# Altium PCB eth_bridge_v2_pcb.PcbDoc
Units mil, origin at the board's own origin, x right, y up, seen from the top; angles counter-clockwise.
Board outline 2370 x 1045 mil, 2 copper layers (Top Layer, Bottom Layer(GND)), stack 27.559 mil thick; 28 components, 24 nets, 114 pads, 164 vias.
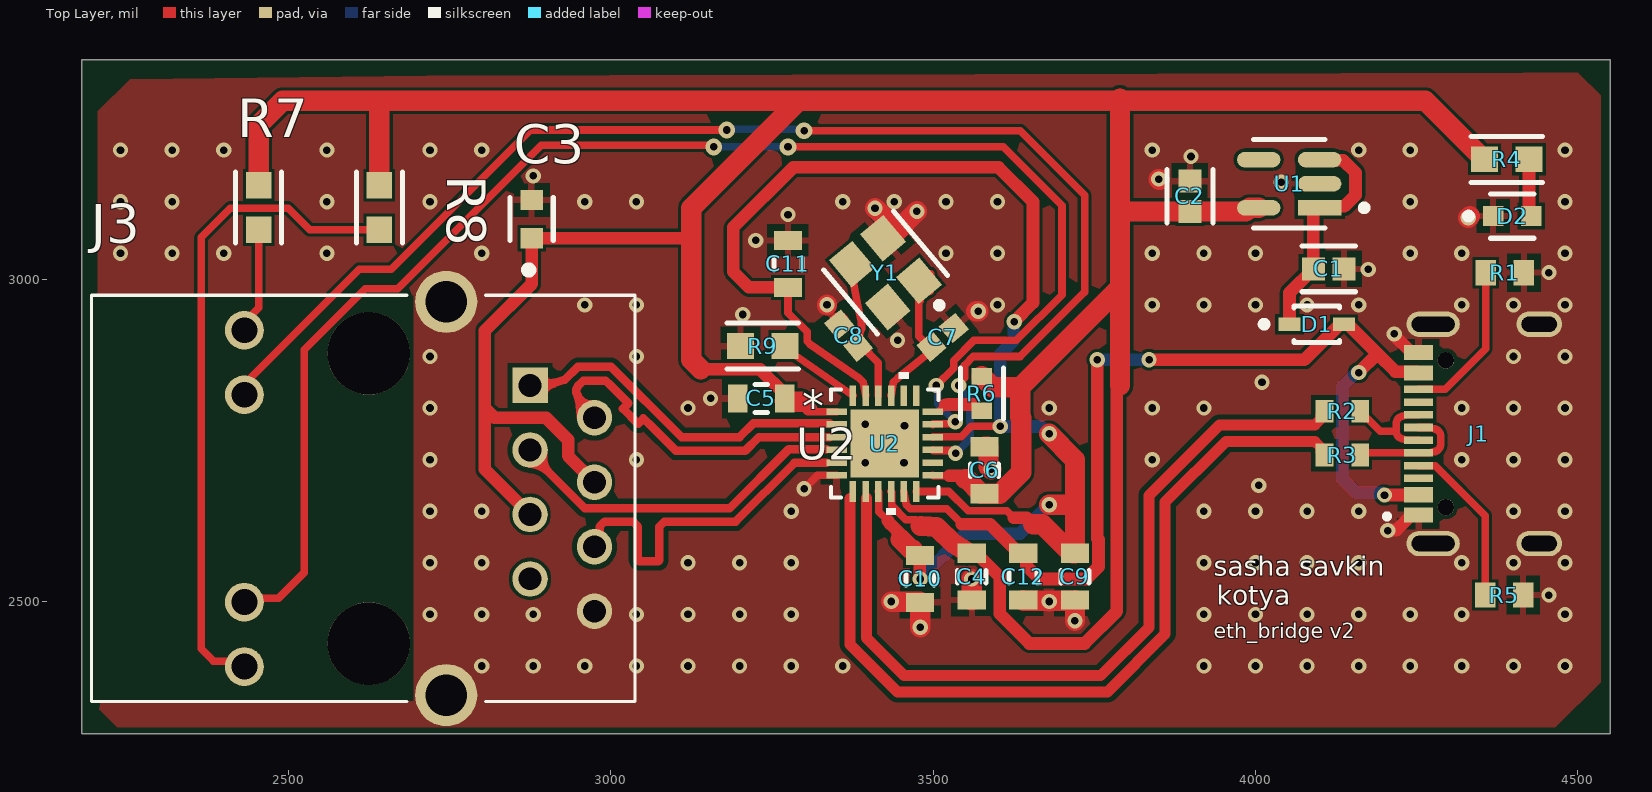
[diagram p0: Top Layer view]
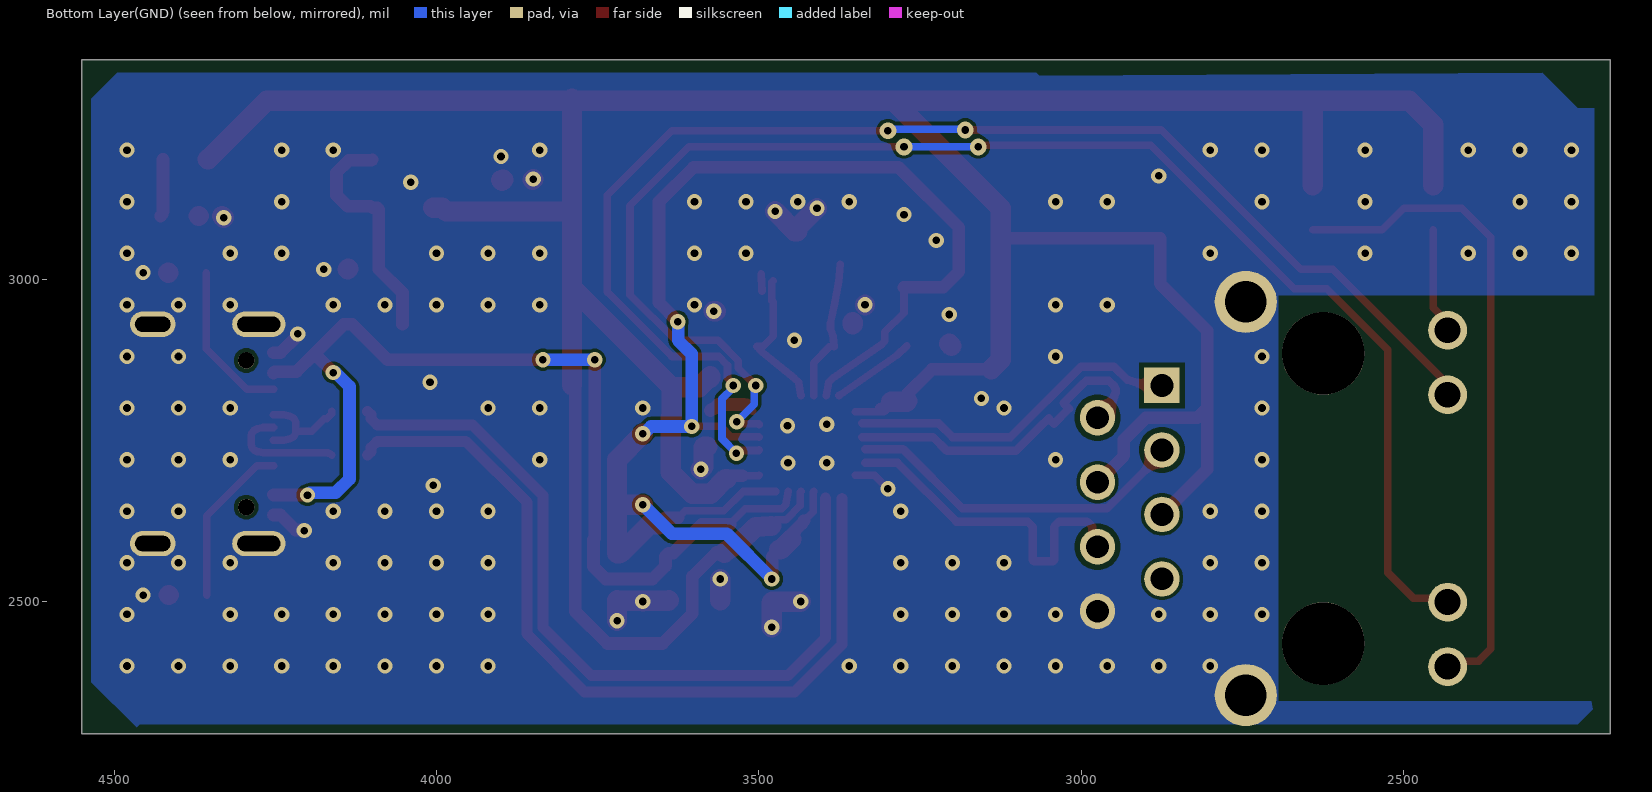
[diagram p1: Bottom Layer(GND) view, seen from below]
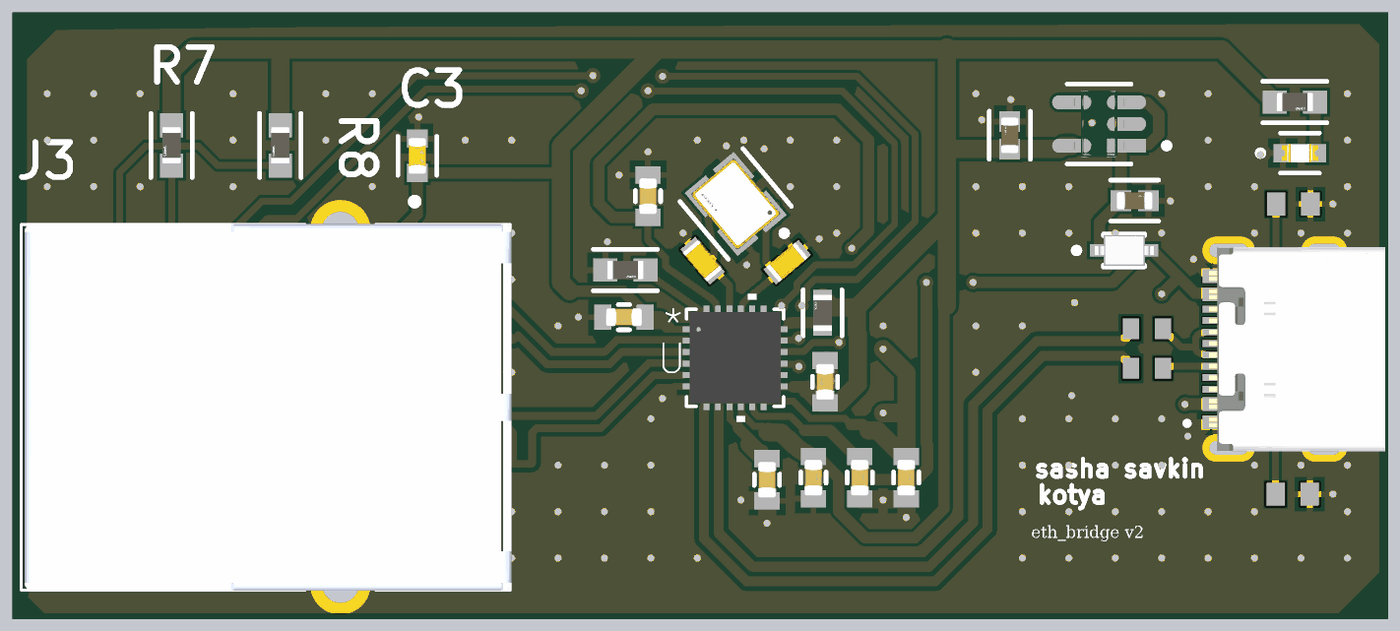
[diagram p2: 3D render of the assembled board from above, using the file's embedded part models]

## Layer stack, top to bottom
Top Solder: solder mask 0.7874, Solder Resist, Dk 3.5
Top Layer: signal copper 0.689
Dielectric 1: dielectric 26.1811, FR-4, Dk 4.3
Bottom Layer(GND): signal copper 0.689
Bottom Solder: solder mask 0.7874, Solder Resist, Dk 3.5

## Board outline
2180,2295 4550,2295 4550,3340 2180,3340

## Design rules (kind name [scope] priority, off if disabled: settings)
BoardOutlineClearance [All] p1: gap=10 ignorepadtopadclearanceinfootprint=FALSE except(0: Arc-SplitContinuation Track-SplitContinuation SMDPad-SplitContinuation THPad-SplitContinuation Via-SplitContinuation Fill-SplitContinuation Poly-SplitContinuation Region-SplitContinuation Text-SplitContinuation)
Clearance Clearance_Z100_Z90 [InDifferentialPair('D_USB') Or InDifferentialPair('D_TX') Or InDifferentialPair('D_RX') Or InDifferentialPair('ETH_RX') Or InDifferentialPair('ETH_TX') Or InDifferentialPair('USB') vs InPolygon] p1: gap=7.99 ignorepadtopadclearanceinfootprint=FALSE
Clearance Clearance_USB [InComponent('J1') OR (HasFootprint('0402') OR HasFootprint('RMCF0402*'))] p2: gap=6 ignorepadtopadclearanceinfootprint=FALSE except(5: THPad-THPad)
Clearance [All] p3: gap=5 ignorepadtopadclearanceinfootprint=FALSE
DiffPairsRouting rx [InDifferentialPair('ETH_RX')] p1: maxlimit=7.99 minlimit=7.99 mostfreqgap=7.99 toplayer_minwidth=13.15 toplayer_maxwidth=13.15 toplayer_prefwidth=13.15 bottomlayer_minwidth=13.15 bottomlayer_maxwidth=13.15 bottomlayer_prefwidth=13.15 impedanceprofiledriven=TRUE impedanceprofileid={D73B9253-5F31-4390-8922-EA40AF682137} impedanceprofilevalue=100.000000 maxuncoupledlength=500
DiffPairsRouting tx [InDifferentialPair('ETH_TX')] p2: maxlimit=7.99 minlimit=7.99 mostfreqgap=7.99 toplayer_minwidth=13.15 toplayer_maxwidth=13.15 toplayer_prefwidth=13.15 bottomlayer_minwidth=13.15 bottomlayer_maxwidth=13.15 bottomlayer_prefwidth=13.15 impedanceprofiledriven=TRUE impedanceprofileid={D73B9253-5F31-4390-8922-EA40AF682137} impedanceprofilevalue=100.000000 maxuncoupledlength=500
DiffPairsRouting usb [InDifferentialPair('USB')] p3: maxlimit=7.99 minlimit=7.99 mostfreqgap=7.99 toplayer_minwidth=17.09 toplayer_maxwidth=17.09 toplayer_prefwidth=17.09 bottomlayer_minwidth=17.09 bottomlayer_maxwidth=17.09 bottomlayer_prefwidth=17.09 impedanceprofiledriven=TRUE impedanceprofileid={98D29A7B-6AB0-4A7E-9638-67E44013104D} impedanceprofilevalue=90.000000 maxuncoupledlength=500
HoleToHoleClearance [All] p1: gap=7.87 allowstackedmicrovias=FALSE
PlaneConnect PlaneConnect_1 [All] p1: planeconnectstyle=Relief reliefexpansion=20 reliefentries=4 reliefconductorwidth=10 reliefairgap=10
PolygonConnect PolygonConnect_3 [InNet('VSUS') AND IsPolygon] p1: connectstyle=Direct reliefconductorwidth=10 reliefentries=4 polygonreliefangle="90 Angle" airgapwidth=10
PolygonConnect PolygonConnect_2 [InNet('GND') AND IsPolygon] p2: thpad.connectstyle=Direct thpad.reliefconductorwidth=10 thpad.reliefentries=4 thpad.polygonreliefangle="90 Angle" thpad.airgapwidth=10 smdpad.connectstyle=Relief smdpad.reliefconductorwidth=10 smdpad.reliefentries=4 smdpad.polygonreliefangle="90 Angle" smdpad.airgapwidth=10 via.connectstyle=Direct via.reliefconductorwidth=10 via.reliefentries=4 via.polygonreliefangle="90 Angle" via.airgapwidth=10
PolygonConnect PolygonConnect_1 [InNet('+3V3') AND IsPolygon] p3: connectstyle=Direct reliefconductorwidth=10 reliefentries=4 polygonreliefangle="90 Angle" airgapwidth=10
PolygonConnect [All] p4: connectstyle=Relief reliefconductorwidth=10 reliefentries=4 polygonreliefangle="90 Angle" airgapwidth=10
RoutingVias [All] p1: holewidth=11.81 width=27.56 viastyle="Through Hole" minholewidth=11.81 minwidth=25.98 maxholewidth=11.81 maxwidth=39.37
SolderMaskExpansion SolderMaskExpansion_2 [IsVia] p1: expansion=4 istentingtop=TRUE
SolderMaskExpansion [All] p2: expansion=4 istentingtop=FALSE
SupplyNets "Schematic Supply Nets_3" [InNet('VBUS')] p1: voltage=0.000
SupplyNets "Schematic Supply Nets_2" [InNet('+3V3')] p2: voltage=0.000
SupplyNets "Schematic Supply Nets_1" [InNet('GND')] p3: voltage=0.000
SupplyNets "Schematic Supply Nets" [InNet('VSUS')] p4: voltage=0.000
UnRoutedNet [All] p1: checkbadconnections=TRUE
Width [All] p1: maxlimit=31.5 minlimit=11.81 preferedwidth=23.62 toplayer_prefwidth=19.68 minimp=50.000000 maximp=50.000000 favimp=50.000000
26 further rules are at their usual default settings.

## Classes and differential pairs
component class eth_bridge_v2: C1 C2 C3 C4 C5 C6 C7 C8 C9 C10 C11 C12 D1 D2 J1 R1 R2 R3 R4 R5 R6 R8 R9 U1 U2 Y1
differential pair ETH_TX: +ETH_TX_P -ETH_TX_N
differential pair USB: +USB_P -USB_N
differential pair ETH_RX: +ETH_RX_P -ETH_RX_N

## Components (designator, comment, footprint, x,y, rotation, side; value= is the part's Value field where it differs from the comment)
C1 "10u 0603 X7T" FP-GRM188-0_2-IPC_C 4113.43,3015.79 r0 top
C2 "10u 0603 X7T" FP-GRM188-0_2-IPC_C 3898.35,3128.44 r90 top
C3 "CC0603KRX7R9BB104" FP-CC0603-DA-MFG 2877.61,3093.03 r90 top value="100 nF"
C4 "CGA3E1X7R1C105M080AC" FP-CGA3E-0_3-0_1-IPC_B 3560,2538.58 r270 top
C5 "CGA3E1X7R1C105M080AC" FP-CGA3E-0_3-0_1-IPC_B 3233.58,2815 r180 top
C6 "CGA3E1X7R1C105M080AC" FP-CGA3E-0_3-0_1-IPC_B 3580,2703.58 r90 top
C7 "CC0603JRNPO9BN180" CAPC1608X90X40LL10T20 3514.85,2909.75 r220 top
C8 "CC0603JRNPO9BN180" CAPC1608X90X40LL10T20 3369.1,2912.4 r310 top
C9 "CGA3E1X7R1C105M080AC" FP-CGA3E-0_3-0_1-IPC_B 3719.85,2538.58 r270 top
C10 "CGA3E1X7R1C105M080AC" FP-CGA3E-0_3-0_1-IPC_B 3480,2535 r270 top
C11 "CGA3E1X7R1C105M080AC" FP-CGA3E-0_3-0_1-IPC_B 3275,3023.58 r90 top
C12 "CGA3E1X7R1C105M080AC" FP-CGA3E-0_3-0_1-IPC_B 3639.85,2538.58 r270 top
D1 "BAT60JFILM" FP-BAT60JFILM-MFG 4095,2930 r0 top
D2 "LTST-C190KGKT" FP-LTST-C190KGKT-MFG 4398.16,3097.72 r0 top
J1 "USB4105-GF-A" GCT_USB4105-GF-A 4440,2760 r90 top
J3 "HR911105A" HANRUN_HR911105A 2625,2659.8 r90 top
R1 "RC0603FR-075K1L" RESC1608X55X25ML10T15 4386.68,3009.96 r0 top
R2 "RC0603FR-0722RL" RESC1608X55X25NL10T15 4134.72,2794.98 r180 top
R3 "RC0603FR-0722RL" RESC1608X55X25NL10T15 4134.72,2726.98 r180 top
R4 "AF0603FR-072K49L" FP-AF0603-IPC_A 4389.47,3185.71 r0 top
R5 "RC0603FR-075K1L" RESC1608X55X25ML10T15 4385.63,2510.04 r180 top
R6 "RC0603FR-0710KL" FP-RC0603-0_55-IPC_C 3575.71,2822.44 r90 top
R7 "AF0603FR-072K49L" FP-AF0603-IPC_A 2454.23,3110.99 r270 top
R8 "AF0603FR-072K49L" FP-AF0603-IPC_A 2641.42,3110.99 r270 top
R9 "AF0603FR-072K49L" FP-AF0603-IPC_A 3236.06,2896.23 r0 top
U1 "AP2112K-3.3TRG1" FP-SOT25-IPC_A 4052.22,3147.83 r180 top
U2 "RTL8152B-VB-CG" RTL8152B-VB-CG_RTK 3425,2745 r0 top
Y1 "ABM8AIG-25.000MHZ-12-2-T3" FP-ABM8AIG-MFG 3426.03,3010.17 r130 top

## Footprints (in the part's own frame and the unit in brackets; to place one, negate y for a bottom-side part, rotate by r counter-clockwise, add the part's x,y. Pads: shape width x height; smd on the part's side, far side on the other; paste and mask are expansions set on the pad)
CAPC1608X90X40LL10T20 [mm] "Chip Capacitor, 2-Leads, Body 1.7x0.9mm, IPC High Density"
  rect 0.85x0.85 smd: 1(-0.575,0) 2(0.575,0)
  body extent -0.85,-0.45 0.85,0.45, height 0.9
FP-ABM8AIG-MFG [mm]
  rect 1.4x1.2 smd paste+0 mask+0: 1(-1.1,-0.8) 2(1.1,-0.8) 3(1.1,0.8) 4(-1.1,0.8)
  silkscreen extent -2.47,-1.8 1.65,1.8, body extent -1.9,-1.5 1.9,1.5, height 0.25
FP-AF0603-IPC_A [mil]
  rect 41.68x39.85 smd paste+0 mask+0: 1(-34.52,0) 2(34.52,0)
  silkscreen extent -55,-36 55,36, body extent -75,-40 75,40, height 10
FP-BAT60JFILM-MFG [mm]
  rect 0.86x0.54 smd paste+0 mask+0: 1(-1.07,0) 2(1.07,0)
  silkscreen extent -2.2,-0.72 0.9,0.72, body extent -1.6,-0.82 1.6,0.82, height 0.25
FP-CC0603-DA-MFG [mm]
  rect 0.8x0.9 smd paste+0 mask+0: 1(-0.75,0) 2(0.75,0)
  silkscreen extent -0.85,-0.85 0.85,0.85, body extent -1.35,-0.75 1.35,0.75, height 0.25
FP-CGA3E-0_3-0_1-IPC_B [mm]
  rect 0.756x1.106 smd paste+0 mask+0: 1(-0.925,0) 2(0.925,0)
  silkscreen extent -0.25,-0.55 0.25,0.55, body extent -1.55,-0.8 1.55,0.8, height 0.25
FP-GRM188-0_2-IPC_C [mil]
  rect 35.63x35.68 smd paste+0 mask+0: 1(-23.64,0) 2(23.64,0)
  silkscreen extent -41,-35 41,35, body extent -45,-24 45,24, height 10
FP-LTST-C190KGKT-MFG [mm]
  rect 0.8x0.8 smd paste+0 mask+0: 1(-0.75,0) 2(0.75,0)
  silkscreen extent -1.85,-0.87 0.85,0.87, body extent -1.25,-0.55 1.25,0.55, height 0.25
FP-RC0603-0_55-IPC_C [mil]
  rect 25.93x31.97 smd paste+0 mask+0: 1(-26.64,0) 2(26.64,0)
  silkscreen extent -40,-33 40,33, body extent -44,-22 44,22, height 10
FP-SOT25-IPC_A [mm]
  rect 1.707x0.616 smd paste+0 mask+0: 1(-1.201,0.95)
  rrect100% 1.707x0.616 smd paste+0 mask+0: 2(-1.201,0) 3(-1.201,-0.95) 4(1.201,-0.95) 5(1.201,0.95)
  silkscreen extent -3.08,-1.75 1.4,1.75, body extent -2.55,-2 2.55,2, height 0.25
GCT_USB4105-GF-A [mm]
  rect 0.6x1.15 smd mask+0.05: A1_B12(-3.2,4.755) A4_B9(-2.4,4.755) B1_A12(3.2,4.755) B4_A9(2.4,4.755)
  rect 0.3x1.15 smd mask+0.05: A5(-1.25,4.755) A6(-0.25,4.755) A7(0.25,4.755) A8(1.25,4.755) B5(1.75,4.755) B6(0.75,4.755) B7(-0.75,4.755) B8(-1.75,4.755)
  oval 1x2.1 hole 0.6 slot 1.7 at 90 deg: SH1(-4.32,4.18) SH2(4.32,4.18)
  oval 1x1.8 hole 0.6 slot 1.4 at 90 deg: SH3(-4.32,0) SH4(4.32,0)
  round 0.65 hole 0.65 unplated: ""(-2.89,3.68) ""(2.89,3.68)
  silkscreen extent -3.35,5.9 -3.15,6.1, body extent -4.47,-2.67 4.47,5.03, height 3.26
HANRUN_HR911105A [mm]
  rect 1.398x1.398 / inner round 1.398 / far side rect 1.398x1.398 hole 0.89: 1(4.45,-6.35)
  round 1.398 hole 0.89: 2(3.18,-8.89) 3(1.91,-6.35) 4(0.64,-8.89) 5(-0.63,-6.35) 6(-1.9,-8.89) 7(-3.17,-6.35) 8(-4.44,-8.89)
  round 1.53 hole 1.02: 9(6.625,4.9) 10(4.085,4.9) 11(-4.085,4.9) 12(-6.625,4.9)
  round 2.445 hole 1.63: 15(7.745,-3.05) 16(-7.745,-3.05)
  round 3.25 hole 3.25 unplated: ""(-5.715,0) ""(5.715,0)
  silkscreen extent -8,-10.48 9.15,10.92, body extent -8.02,-10.53 8.02,10.78, height 13.5
RESC1608X55X25ML10T15 [mm] "Chip Resistor, 2-Leads, Body 1.60x0.80mm, IPC Low Density"
  rect 0.8x1 smd: 1(-0.75,0) 2(0.75,0)
  body extent -0.85,-0.45 0.85,0.45, height 0.55
RESC1608X55X25NL10T15 [mm] "Chip Resistor, 2-Leads, Body 1.70x0.90mm, IPC Medium Density"
  rect 0.7x0.9 smd: 1(-0.7,0) 2(0.7,0)
  body extent -0.85,-0.45 0.85,0.45, height 0.55
RTL8152B-VB-CG_RTK [mm]
  rect 0.808x0.255 smd paste+0 mask+0: 1(-1.89,1.25) 2(-1.89,0.75) 3(-1.89,0.25) 4(-1.89,-0.25) 5(-1.89,-0.75) 6(-1.89,-1.25) 13(1.89,-1.25) 14(1.89,-0.75) 15(1.89,-0.25) 16(1.89,0.25) 17(1.89,0.75) 18(1.89,1.25)
  rect 0.255x0.808 smd paste+0 mask+0: 7(-1.25,-1.89) 8(-0.75,-1.89) 9(-0.25,-1.89) 10(0.25,-1.89) 11(0.75,-1.89) 12(1.25,-1.89) 19(1.25,1.89) 20(0.75,1.89) 21(0.25,1.89) 22(-0.25,1.89) 23(-0.75,1.89) 24(-1.25,1.89)
  rect 2.692x2.692 smd paste-1.346 mask+0: 25(0,0)
  silkscreen extent -2.12,-2.8 2.12,2.8, body extent -1.99,-1.99 1.99,1.99, height 0.89

## Part data
C1 C2: library part CMP-06035-057161-1, "10uF 10V X7T 0603 20%", Capacitance=10uF, Case/Package=0603, Dielectric=X7T, Max Operating Temperature=125°C, Min Operating Temperature=-55°C, Package Quantity=10000, Supplier Part Number 1=490-GRM188D71A106KA73JDKR-ND, Tolerance=20%, Voltage Rating=10V, Length=0.063inch, Mount="Surface Mount", Packaging="Tape and Reel", Supplier 1=DigiKey, Thickness=0.039inch, Voltage Rating (DC)=10V, Weight=0.000222oz, Width=0.031inch
C3: library part CMP-2100-03601-2, "CAP CER 0.1UF 50V X7R 0603", Capacitance="100 nF", Manufacturer=YAGEO, Package=CC0603-DA, Temperature="-55°C to +125°C", Temperature Characteristic=X7R, Temperature Coefficient=15%, Temperature Range High=+125°C, Temperature Range Low=-55°C, Tolerance=0.1, Voltage="50 V", Automotive=No, Category=Cap, ComponentLink2Description=Datasheet, ComponentLink2URL=http://www.yageo.com/documents/recent/UPY-GPHC_X7R_6.3V-to-50V_18.pdf, Device Class L1="Passive Components", Device Class L2=Capacitors, Device Class L3="Ceramic Capacitors", Digikey Description="CAP CER 0.1UF 50V X7R 0603", Footprint Url=http://www.yageo.com/exep/pages/download/literatures/UPY-C_GEN_24.pdf, Height=0.9mm, Lead Free=Yes, Manufacturer Part Number=CC0603KRX7R9BB104, Material=Ceramic, Mouser Description="Multilayer Ceramic Capacitor, CC Series, 0.1 - F, - 10%, X7R, 50 V, 0603 [1608 Metric]", Octopart=https://octopart.com/cc0603krx7r9bb104-yageo-42244635, RoHS=TRUE, Voltage Rating="50 V"
C4 C5 C6 C9 C10 C11 C12: library part CMP-08246-001804-1, "Cap Ceramic 1uF 16V X7R 20% Pad SMD 0603 +125°C Automotive T/R", Capacitance=1uF, Case Code (Imperial)=0603, Case Code (Metric)=1608, Dielectric=X7R, Max Operating Temperature=125°C, Min Operating Temperature=-55°C, Package Quantity=4000, Ratings=AEC-Q200, Tolerance=20%, Voltage Rating=16V, Case/Package=0603, Height=0.8mm, Lead Free="Lead Free", Length=0.063inch, Mount="Surface Mount", Packaging="Tape and Reel", Termination=SMD/SMT, Thickness=0.035inch, Voltage Rating (DC)=16V, Weight=7.1E-05oz, Width=0.031inch
C7 C8: library part CMP-1659-00030-1, "Chip Capacitor, 18 pF, +/- 5%, 50 V, -55 to 125 degC, 0603 (1608 Metric), RoHS, Tape and Reel", Case Code (Imperial)=0603, Case Code (Metric)=1608, Max Operating Temperature="155 degC", Min Operating Temperature="-55 degC", Package Quantity=200, Power Rating="100 mW", Resistance="68.1 Ohm", Tolerance=1%, Voltage Rating="50 V", Case\Package=0603, ComponentLink1Description="Manufacturer URL", ComponentLink1URL=http://www.yageo.com/, ComponentLink2Description=Datasheet, ComponentLink2URL=http://www.yageo.com/NewPortal/yageodocoutput?fileName=/pdf/MLCC/UPY-GP_NP0_16V-to-50V_14.pdf, DatasheetVersion="Rev. 14, 07/2016", Height="0.45 mm", Length="1.6 mm", PackageDescription="2-Pin Surface Mount Device, Body 1.6 x 0.8 mm", PackageReference=0603, Packaging="Tape and Reel", Radiation Hardening=No, RoHSCompliant=true, Width="0.8 mm"
D1: library part CMP-12187-000028-1, "SCHOTTKY 10V 3A SOD323", Average Rectified Current=3A, Forward Voltage=580mV, Max Forward Surge Current (Ifsm)=5A, Max Operating Temperature=150°C, Max Repetitive Reverse Voltage (Vrrm)=10V, Max Reverse Leakage Current=7.5uA, Min Operating Temperature=-65°C, Package Quantity=1, Contact Plating=Tin, Current Rating=3A, Element Configuration=Single, Forward Current=3A, Height=1.07mm, Lead Free="Lead Free", Length=1.8mm, Max Reverse Voltage (DC)=10V, Max Surge Current=5A, Mount="Surface Mount", Number of Pins=2, Output Current=3A, Packaging="Tape and Reel", Peak Non-Repetitive Surge Current=5A, Peak Reverse Current=7.5uA, Polarity=Standard, Radiation Hardening=No, REACH SVHC="No SVHC", Supplier 1="Future Electronics", Supplier Part Number 1=BAT60JFILM, Voltage Rating (DC)=10V, Weight=0.01lb, Width=1.45mm
D2: library part CMP-2000-05197-2, "LED GREEN CLEAR CHIP SMD", Case Code (Imperial)=0603, Case Code (Metric)=1608, Color=Green, Forward Current=30mA, Forward Voltage=2V, Lens Color=Colorless, Max Operating Temperature=85°C, Min Operating Temperature=-55°C, Package Quantity=1, Power Dissipation=75mW, Reverse Voltage=5V, Test Current=20mA, Case/Package=0603, Depth=0.8mm, Dominant Wavelength=571nm, Height=0.8mm, Illumination Color=Green, Lead Free="Lead Free", Length=1.6mm, Lens Style=Diffused, Lens Transparency=Clear, Luminous Intensity=35mcd, Mount="Surface Mount", Number of Elements=1, Number of LEDs=1, Number of Pins=2, Packaging="Tape and Reel", Power Rating=75mW, Radiation Hardening=No, Viewing Angle=130°, Wavelength=574nm, Width=0.8mm
J1: library part CMP-007-000001-1, "USB-C", Package=None, Availability=Unavailable, Component Type=Standard, Design Item ID=USB4105-GF-A, MF="{'manufacturer': u'GCT'}", MP=USB4105-GF-A, Pin Count=16, Price=None, Source=USB4105-GF-A.SchLib, Supplier 1="Future Electronics", Supplier Part Number 1=USB4105-GF-A
J3: library part CMP-002-00071-1, "DIP RJ45 Connector;", Case/Package=None, Availability="Not in stock", Check_prices=https://www.snapeda.com/parts/HR911105A/HanRun/view-part/?ref=eda, Component Type=Standard, Design Item ID=HR911105A, MF=hanrun, MP=HR911105A, Pins=13, Price=None, SnapEDA_Link=https://www.snapeda.com/parts/HR911105A/HanRun/view-part/?ref=snap, Source=HR911105A.SchLib
R1 R5: library part CMP-2000-04091-1, Manufacturer=Yageo, Part Number=RC0603FR-075K1L
R2 R3: library part CMP-1659-00033-1, "Chip Resistor, 22 Ohm, +/- 1%, 0.1 W, -55 to 155 degC, 0603 (1608 Metric), RoHS, Tape and Reel", Case\Package=SIP, Max Input Voltage="1.4 V", Max Operating Temperature="100 degC", Max Ouput Current="8 A", Min Operating Temperature="-25 degC", Package Quantity=200, ComponentLink1Description="Manufacturer URL", ComponentLink1URL=http://www.yageo.com/, ComponentLink2Description=Datasheet, ComponentLink2URL=http://www.yageo.com/documents/recent/PYu-RC_Group_51_RoHS_L_04.pdf, DatasheetVersion="Rev. 4, 02/2016", Height="19.6 mm", Length="18.5 mm", Mount="Through Hole", Output Current="8 A", PackageDescription="2-Pin Surface Mount Device, Body 1.6 x 0.8 mm", PackageReference=0603, Packaging=Rail/Tube, Pins=4, Radiation Hardening=No, REACH SVHC=Unknown, RoHSCompliant=true
R4 R7 R8 R9: library part CMP-03412-039857-1, "Anti-Sulfurated Chip Resistors Automotive Grade 2.49kΩ 1% 100ppm/°C 0603", Case/Package=0603, Max Operating Temperature=155°C, Max Power Dissipation=100mW, Min Operating Temperature=-55°C, Resistance=2.49kR, Resistor Type="Thick Film", Temperature Coefficient=100ppm/°C, Tolerance=1%, Features="Moisture Resistant", Height=0.022inch, Length=0.063inch, Number of Terminations=2, Packaging="Tape and Reel", RoHS Compliant=Yes, Series=AF, Width=0.031inch
R6: library part CMP-2100-03664-2, "RES 10K OHM 1% 1/10W 0603", Case Code (Imperial)=0603, Case Code (Metric)=1608, Max Operating Temperature=155°C, Max Power Dissipation=100mW, Min Operating Temperature=-55°C, Resistance=10kR, Resistance Tolerance=1%, Resistor Type="Thick Film", Temperature Coefficient=100ppm/°C, Voltage Rating=75V, Voltage Rating (DC)=50V, Case/Package=0603, Construction=Rectangular, Depth=0.8mm, Features="Moisture Resistant", Height=0.45mm, Lead Free="Lead Free", Lead Pitch=0.3mm, Length=1.6mm, Military Standard=Not, Number of Pins=2, Number of Terminations=2, Packaging="Tape and Reel", Power Rating=100mW, RoHS Compliant=Yes, Series=RC, Size Code=0603, Termination=SMD/SMT, Tolerance=1%, Weight=7.1E-05oz, Width=0.8mm
U1: library part CMP-12756-000035-1, "LDO 3.3V 600MA SOT25", Case/Package=SOT-23-5, Dropout Voltage=250mV, Max Input Voltage=6V, Max Operating Temperature=85°C, Max Output Current=600mA, Min Input Voltage=2.5V, Min Operating Temperature=-40°C, Output Voltage=3.3V, Package Quantity=1, Quiescent Current=55uA, Accuracy=1.5%, Height=1.3mm, Lead Free="Lead Free", Length=3.1mm, Mount="Surface Mount", Number of Outputs=1, Number of Pins=5, Number of Regulators=1, Output Current=600mA, Output Type=Fixed, Packaging="Tape and Reel", Polarity=Positive, Supplier 1=Avnet, Supplier Part Number 1=AP2112K-3.3TRG1, Width=1.7mm
U2: "Description", Manufacturer_Name=Realtek, Copyright="Copyright (C) 2026 Ultra Librarian. All rights reserved.", Manufacturer_Part_Number=RTL8152B-VB-CG, RefDes=RefDes, Type=Type
Y1: library part CMP-27762-015150-1, "Crystal 25MHz ±20ppm (Tol) ±100ppm (Stability) 12pF FUND 50Ω Automotive 4-Pin Ultra Mini-CSMD T/R", Case/Package=SMD/SMT, ESR (Equivalent Series Resistance)=50R, Frequency=25MHz, Frequency Stability=100ppm, Frequency Tolerance=20ppm, Load Capacitance=12pF, Max Operating Temperature=125°C, Min Operating Temperature=-40°C, Ratings=AEC-Q200, Height=0.031inch, Length=0.126inch, Mount="Surface Mount", Packaging="Tape and Reel", RoHS Compliant=Yes, Series=ABM8AIG, Width=0.098inch

## Via types
v1: diameter 23.62, hole 11.81, Top Layer to Bottom Layer(GND), tented both sides, 160 vias
v2: diameter 25.98, hole 11.81, Top Layer to Bottom Layer(GND), tented both sides, 4 vias

## Nets (pads, with @x,y where several pads share a name; then routed paths per layer and width w, separated by ;. In a path a pad name is that pad's centre, name@x,y a point inside that pad or via, vN(x,y) a via of type N, cw(c..) or ccw(c..) an arc to the next point about the centre after c; other vN are vias at no path point)
+3V3: C2.1 C3.1 C4.1 C5.1 C6.1 J3.4 J3.5 R4.1 R6.2 R7.1 R8.1 U1.5 U2.1 U2.10 U2.13 | length 5976.6
  Top Layer w11.81: 3310.79,2798.39 3314.96,2794.21 U2.1 ; U2.10 3435.73,2669.7 3435.73,2648.96 3457.72,2626.97 3473.03,2626.97 3480,2620 ; U2.13 3500.19,2695 3525,2695
  Top Layer w19.68: J3.5 2805,2705 2805,2800 ; J3.4 2934.12,2725.88 2934.12,2750.88 2900,2785 2820,2785 2805,2800 ; 3125,3060 3121.5,3063.5 C3.1 2877.61,2992.61 2805,2920 2805,2800 ; 3140,2860 3231.89,2860 3270,2821.89 C5.1 ; 3295,2810 3306.61,2798.39 3310.79,2798.39 ; 3480,2620 3480.81,2619.19 3480.81,2617.13 ; 3525,2695 3545,2695 3550,2690 ; C4.1@3566.03,2575.86 3603.24,2538.65 3603.24,2481.13 3649.37,2435 3735,2435 3785,2485 3785,2830 3790,2835
  Top Layer w31.5: R7.1 2454.23,3239.23 2491.42,3276.42 2641.42,3276.42 ; R8.1 2641.42,3276.42 ; 3140,2860 3125,2875 3125,3060 3125,3110 3291.42,3276.42 ; C5.1@3270,2810.86 3270.86,2810 3295,2810 ; 3480.81,2617.13 3494.24,2616.31 3505.37,2615.63 3532.33,2589.41 C4.1@3553.97,2575.86 ; 3550,2690 3552,2690 3574.83,2667.17 3603.78,2667.17 3636.7,2700.09 3636.7,2785.02 3635,2786.72 3635,2832.18 ; R6.2 3575.71,2846.54 3575.95,2846.3 3578.49,2846.3 3592.61,2832.18 3635,2832.18 ; 3790,2835 3790,2987.18 ; 3790,3280 3790,3104.8 ; U1.5 3990.72,3110.43 3985.08,3104.8 C2.1 3790,3104.8 ; R4.1 4354.04,3185.71 4263.33,3276.42 3291.42,3276.42 ; 2641.42,3276.42 3291.42,3276.42 ; 3635,2832.18 3790,2987.18 ; 3790,2987.18 3790,3104.8
CC1_IN: J1.A5 R5.2 | length 258.6
  Top Layer w11.81: J1.A5 4278.49,2710.79 4356.11,2633.17 R5.2
CC2_IN: J1.B5 R1.1 | length 248.4
  Top Layer w11.81: J1.B5 4293.9,2828.9 4357.16,2892.16 R1.1
D+: J1.A6 J1.B6 R2.1 | length 166.1
  Top Layer w11.81: R2.1 4162.28,2791.05 4170.16,2783.17 4174.09,2783.17 4193.33,2763.94 4218.25,2763.94 ; J1.A6 4236.06,2750.16 4227.23,2752.4 cw(c4230.16,2763.94) 4218.25,2763.94 ; J1.B6 4236.06,2789.53 4227.23,2787.29 ccw(c4230.16,2775.75) 4218.25,2775.75 4218.25,2763.94
D-: J1.A7 J1.B7 R3.1 | length 186.4
  Top Layer w11.81: R3.1 cw(c4170.7,2718.56) 4170.7,2730.47 J1.B7 4269.53,2730.47 4278.36,2732.71 ccw(c4275.43,2744.25) 4287.34,2744.25 4287.34,2756.06 ccw(c4275.43,2756.06) 4278.36,2767.6 4269.53,2769.84 J1.A7
ETH_RX_N: J3.6 U2.5 | length 539.6
  Top Layer w13.15: J3.6 2983.02,2593.02 2983.02,2616.1 2990.72,2623.81 2995,2623.81 3034.72,2623.81 3042.43,2616.1 3042.43,2563.87 3044.09,2562.21 3073.92,2562.21 3075.58,2563.87 3075.58,2616.1 3083.28,2623.81 3120,2623.81 3193.71,2623.81 3284.9,2715 U2.5@3335,2715
ETH_RX_P: J3.3 U2.4 | length 538.2
  Top Layer w13.15: J3.3 2875,2729.71 2959.76,2644.95 3184.95,2644.95 3276.14,2736.14 U2.4@3335,2736.14
ETH_TX_N: J3.2 U2.3 | length 533.9
  Top Layer w13.15: J3.2 2959.77,2792.61 2956.03,2796.36 2947.06,2824.08 2947.06,2829.39 2950,2835 2957.7,2842.7 2992.3,2842.7 2999.41,2835.59 3004.06,2830.94 3027.5,2807.5 3019.09,2799.09 3042.53,2775.65 3050.94,2784.06 3065.59,2769.41 3101.14,2733.86 3208.76,2733.86 3229.9,2755 U2.3@3340,2755
ETH_TX_P: J3.1 U2.2 | length 528.8
  Top Layer w13.15: J3.1 2895.94,2833.38 2929.24,2844.14 2948.95,2863.84 3001.05,2863.84 3109.9,2755 3200,2755 3221.14,2776.14 U2.2@3340,2776.14
GND: C1.2 C2.2 C3.2 C4.2 C5.2 C6.2 C7.1 C8.1 C9.2 C10.2 C11.2 C12.2 D2.1 J1.A1_B12 J1.B1_A12 J1.SH1 J1.SH2 J1.SH3 J1.SH4 J3.8 J3.15 J3.16 R1.2 R5.1 R9.1 U1.2 U2.6 U2.25 Y1.2 Y1.4 | length 561.9
  Top Layer w11.81: v1(3300,2675) 3320.79,2695.79 U2.6
  Top Layer w19.68: v1@4009.25,2840.75 v1(4010,2840) ; v1(4205,2610) 4205.75,2610.75 4218.71,2610.75 4241.97,2634.02 J1.A1_B12 ; v1(4215,2915) 4215.75,2914.25 4215.75,2912.2 4241.97,2885.98 J1.B1_A12
  Top Layer w31.5: R9.1 R9.1@3205,2899.69 ; v1@3335.6,2959.01 v1(3335.6,2960.06) ; C8.1 C8.1@3354.55,2933.11 ; v1(3410,3110) 3440.46,3079.54 3440.46,3074.34 3444.34,3074.34 v1(3475,3105) ; v1(3435,2500) 3435.56,2499.44 3479.14,2499.44 C10.2 v1(3480,2460) ; C4.2 v1(3560,2535) ; v1@3566.62,2950 v1(3570,2950) ; C6.2 3585.17,2740 3586.03,2739.14 3586.03,2708.97 v1(3590,2705) ; C12.2 3640.72,2501.3 3678.7,2501.3 v1(3680,2500) 3681.3,2501.3 3718.99,2501.3 C9.2 3720,2502.02 v1(3720,2470) ; v1(3850,3155) v1@3850.85,3154.15 ; C2.2@3896.28,3154.15 C2.2 C2.2@3900,3153.73 ; C1.2 C1.2@4137.86,3015 ; v1(4330,3095) v1@4332.72,3097.72
  other v1: 2800,2400 2880,2400 2960,2400 3040,2400 3120,2400 3200,2400 3280,2400 3360,2400 3920,2400 4000,2400 4080,2400 4160,2400 4240,2400 4320,2400 4400,2400 4480,2400 2720,2480 2800,2480 2880,2480 3040,2480 3120,2480 3200,2480 3280,2480 3920,2480 4000,2480 4080,2480 4160,2480 4240,2480 4320,2480 4480,2480 4455,2510 2720,2560 2800,2560 3120,2560 3200,2560 3280,2560 3920,2560 4000,2560 4080,2560 4160,2560 4320,2560 4400,2560 4480,2560 2720,2640 2800,2640 3280,2640 3920,2640 4000,2640 4080,2640 4160,2640 4400,2640 4480,2640 4005,2680 3395,2715 3455,2715 2720,2720 3040,2720 3840,2720 4320,2720 4400,2720 4480,2720 3455.65,2772.55 3395,2775 2720,2800 3120,2800 3680,2800 3840,2800 3920,2800 4320,2800 4400,2800 4480,2800 3155,2815 2720,2880 3040,2880 4400,2880 4480,2880 3445,2905 3205,2945 2960,2960 3040,2960 3600,2960 3840,2960 3920,2960 4000,2960 4080,2960 4160,2960 4320,2960 4400,2960 4480,2960 4455,3010 4175,3015 2240,3040 2320,3040 2400,3040 2560,3040 2800,3040 3520,3040 3600,3040 3840,3040 3920,3040 4000,3040 4240,3040 4320,3040 4480,3040 3225,3060 3275,3100 2240,3120 2320,3120 2560,3120 2720,3120 2960,3120 3040,3120 3360,3120 3440,3120 3520,3120 3600,3120 4240,3120 4480,3120 4040,3150 2880,3160 3900,3190 2240,3200 2320,3200 2400,3200 2560,3200 2720,3200 2800,3200 3840,3200 4160,3200 4240,3200 4480,3200
GREEN: J3.10 U2.15 | length 2103.1
  Top Layer w11.81: J3.10 2432.09,2837.09 2610,3015 2660,3015 2876.26,3231.26 v2(3180,3231.26) ; v2(3300,3230) 3635,3230 3735,3130 3735,2980 3635,2880 3562.26,2880 3548.82,2866.57 3548.82,2847.02 3540,2838.2 v1(3540,2835) ; U2.15 3500.3,2734.27 3527.54,2734.27 3531.8,2730 v1(3535,2730)
  Bottom Layer(GND) w11.81: v2(3180,3231.26) 3181.24,3232.5 3297.5,3232.5 v2(3300,3230) ; v1(3535,2730) 3557.28,2752.28 3557.28,2814.52 3540,2831.8 v1(3540,2835)
LED_AN: D2.2 R4.2 | length 89
  Top Layer w19.68: R4.2 4423.99,3106.65 ccw(c4436.62,3106.65) D2.2
NetJ3_9: J3.9 R7.2 | length 165
  Top Layer w11.81: J3.9 2432.09,2933.73 2454.23,2955.87 R7.2
NetJ3_12: J3.12 R8.2 | length 1025.7
  Top Layer w11.81: J3.12 2423.4,2407.67 2384.25,2407.67 2365,2426.92 2365,3065 2410,3110 2500,3110 2533.53,3076.47 R8.2
NetR6_1: R6.1 U2.18 | length 74.6
  Top Layer w11.81: U2.18@3509.41,2795.1 3519.3,2805
  Top Layer w19.68: 3519.3,2805 3523.1,2805 3523.53,2805.43 3563.06,2805.43 3569.57,2798.92 3572.59,2798.92 R6.1
NetR9_2: R9.2 U2.24 | length 130.5
  Top Layer w11.81: R9.2 3285.51,2882.21 U2.24
USB_N: R3.2 U2.7 | length 1285.6
  Top Layer w17.09: U2.7@3371.52,2659.49 3371.52,2433.01 3444.61,2359.92 3770.39,2359.92 3860,2449.53 3860,2653.99 3954.45,2748.44 4091.92,2748.44 4101.93,2738.43 4101.93,2732.22 R3.2
USB_P: R2.2 U2.8 | length 1245
  Top Layer w17.09: U2.8@3396.6,2660.4 3396.6,2443.4 3455,2385 3760,2385 3834.92,2459.92 3834.92,2664.38 3944.06,2773.52 4091.92,2773.52 4101.93,2783.53 4101.93,2789.75 R2.2
V_CORE_1V05: C9.1 C10.1 C11.1 U2.9 U2.12 U2.16 U2.23 | length 2410
  Top Layer w11.81: C11.1 3275,2947.99 3305,2917.99 3305,2903.37 3309.2,2899.17 3385.32,2846.22 3391.71,2839.83 U2.23 ; U2.9 3416.05,2669.7 3416.05,2639.3 3430.17,2625.17 ; U2.12 3524.49,2670.59 3554.57,2640.51 3614.49,2640.51 3625,2630 ; U2.16 3500.3,2755.73 3543.65,2755.73 3559.44,2771.53 v1(3604.15,2771.53)
  Top Layer w19.68: C11.1 3214.37,2987.17 3190,3011.53 3190,3080 3283.27,3173.27 3601.73,3173.27 3655,3120 3655,2963.46 3626.06,2934.52 v1(3626.06,2933.94) ; 3430.17,2625.17 3433.81,2620.17 3449.83,2604.14 3449.83,2596.5 ; C10.1@3468.28,2580.63 3479.25,2569.67 3479.25,2535.75 v1(3480,2535) ; 3625,2630 3645,2630 3655,2620
  Top Layer w31.5: 3449.83,2596.5 3464.79,2581.54 C10.1@3468.28,2580.63 ; 3655,2620 3669.69,2620 C9.1@3713.83,2575.86 ; v1(3680,2650) 3720,2650 ; v1(3680,2760) 3720,2720 3720,2650 ; C9.1@3716.51,2575.86 3717.37,2575 C9.1 ; C9.1@3720,2575.86 3720,2650
  Bottom Layer(GND) w19.68: v1(3480,2535) 3550,2605 3635,2605 v1(3680,2650) ; v1(3626.06,2933.94) 3625.31,2933.18 3625.31,2904.98 3604.15,2883.82 v1(3604.15,2771.53) 3667.41,2771.53 3678.93,2760 v1(3680,2760)
VBUS: C12.1 D1.2 J1.A4_B9 J1.B4_A9 U2.11 | length 1597.9
  Top Layer w11.81: U2.11 3458.29,2650.17 3464.68,2643.78 3521.22,2643.78 3545,2620
  Top Layer w19.68: 3545,2620 3545.24,2619.76 3588.2,2619.76 3632.96,2575 3639.96,2575 3645,2569.96 3645,2555 3665,2535 3737.51,2535 3756.47,2553.97 3756.47,2596.03 3754.68,2597.82 v1(3754.68,2874.91) ; v1(3835,2875) 4075.83,2875 4130.83,2930 D1.2 ; D1.2@4143.43,2930 4189.21,2884.21 ; v1(4160,2855) 4189.21,2884.21 ; v1(4200,2665) 4200.26,2665.26 4252.54,2665.26 J1.A4_B9 ; J1.B4_A9 4250.83,2856.46 4216.97,2856.46 4189.21,2884.21
  Bottom Layer(GND) w19.68: v1(3754.68,2874.91) 3754.73,2874.96 v1(3835,2875) v1(3835,2875) ; v1(4160,2855) 4156.53,2855 4135,2833.47 4135,2690 4156.23,2668.77 4196.23,2668.77 v1(4200,2665)
VSUS: C1.1 D1.1 U1.1 U1.3 | length 366.6
  Top Layer w19.68: D1.1 4052.87,2978.85 C1.1 ; C1.1 4089.79,3108.15 4092.07,3110.43 U1.1 4101.76,3112.71 4137.71,3112.71 4155,3130 4155,3165 4135.64,3184.36 4100.35,3184.36 U1.3
XTAL_IN: C7.2 U2.21 Y1.1 | length 252
  Top Layer w11.81: U2.21 3438.61,2839.83 3444.99,2846.22 3491.28,2883.6 3495.73,2887.34 3503.09,2895.41 3493.82,2895.41 3478,2911.23 3478,2964.78 3480.06,2966.85 3480.06,2995.17 Y1.1 ; Y1.1@3495.33,2981.39 Y1.1@3496.14,3007.99
XTAL_OUT: C8.2 U2.22 Y1.3 | length 215.9
  Top Layer w11.81: Y1.3 3376.06,2996.5 3383.03,2958.71 3389.02,2931.65 3389.02,2923.17 3384.98,2910.32 C8.2 ; C8.2@3390.6,2895.06 3415.16,2870.51 U2.22
YELLOW: J3.11 U2.17 | length 2306.4
  Top Layer w11.81: J3.11 2438.11,2505 2485,2505 2525,2545 2525,2890.7 2619.3,2985 2670,2985 2892.71,3207.71 3157.29,3207.71 v2(3160,3205) ; v2(3275,3205) 3608.84,3205 3700,3113.84 3700,2975.75 3629.25,2905 3563.48,2905 3532.01,2873.53 3532.01,2862.01 v1(3505,2835) ; U2.17 3500.3,2775.42 3528.01,2775.42 3531.37,2778.78 v1(3534.57,2778.78)
  Bottom Layer(GND) w11.81: v2(3160,3205) v2(3275,3205) ; v1(3505,2835) 3507.26,2832.74 3507.26,2806.09 v1(3534.57,2778.78)
pads on no net: J1. J1.A8 J1.B8 J3. J3.7 U1.4 U2.14 U2.19 U2.20

## Polygon pours and split planes (outlines as drawn)
GND on Top Layer "GND_L01_P000" (solid, pour order 0): 2715,3315 4415,3320 4500,3320 4535,3285 4535,2375 4465,2305 2235,2305 2205,2335 2205,3260 2255,3310
GND on Bottom Layer(GND) "GND_L02_P001" (solid, pour order 1): 3065,3315 3070,3320 4495,3320 4535,3280 4535,2375 4465,2305 4460,2310 2230,2310 2205,2335 2205,3265 2230,3265 2285,3320

## Other copper
Multi-Layer:
  pour cut-out: 2695,2975 2695,2345 2195,2345 cw(c2231.22,2360) 2195,2375 2200,2975

## Silkscreen, mask and mechanical layers (free items; w line width, h text height)
Top Overlay:
  text "sasha savkin" at 3935,2540 h30
  text "kotya" at 3940,2495 h30
  text "eth_bridge v2" at 3935,2435 h40

## Text inside footprints (layer, text, board x,y; h text height)
U2: Top 3D Body "*" at 3354,2779.06 h50; Top Overlay "*" at 3297.19,2779.06 h50